# Altium PCB Kill_Switch_4_Layer_JV.PcbDoc
Units mil, origin at the board's own origin, x right, y up, seen from the top; angles counter-clockwise.
Board outline 5825 x 3000 mil, 4 copper layers (Top Layer, Pwr, Gnd, Bottom Layer), stack 30.634 mil thick; 47 components, 44 nets, 247 pads, 16 vias.
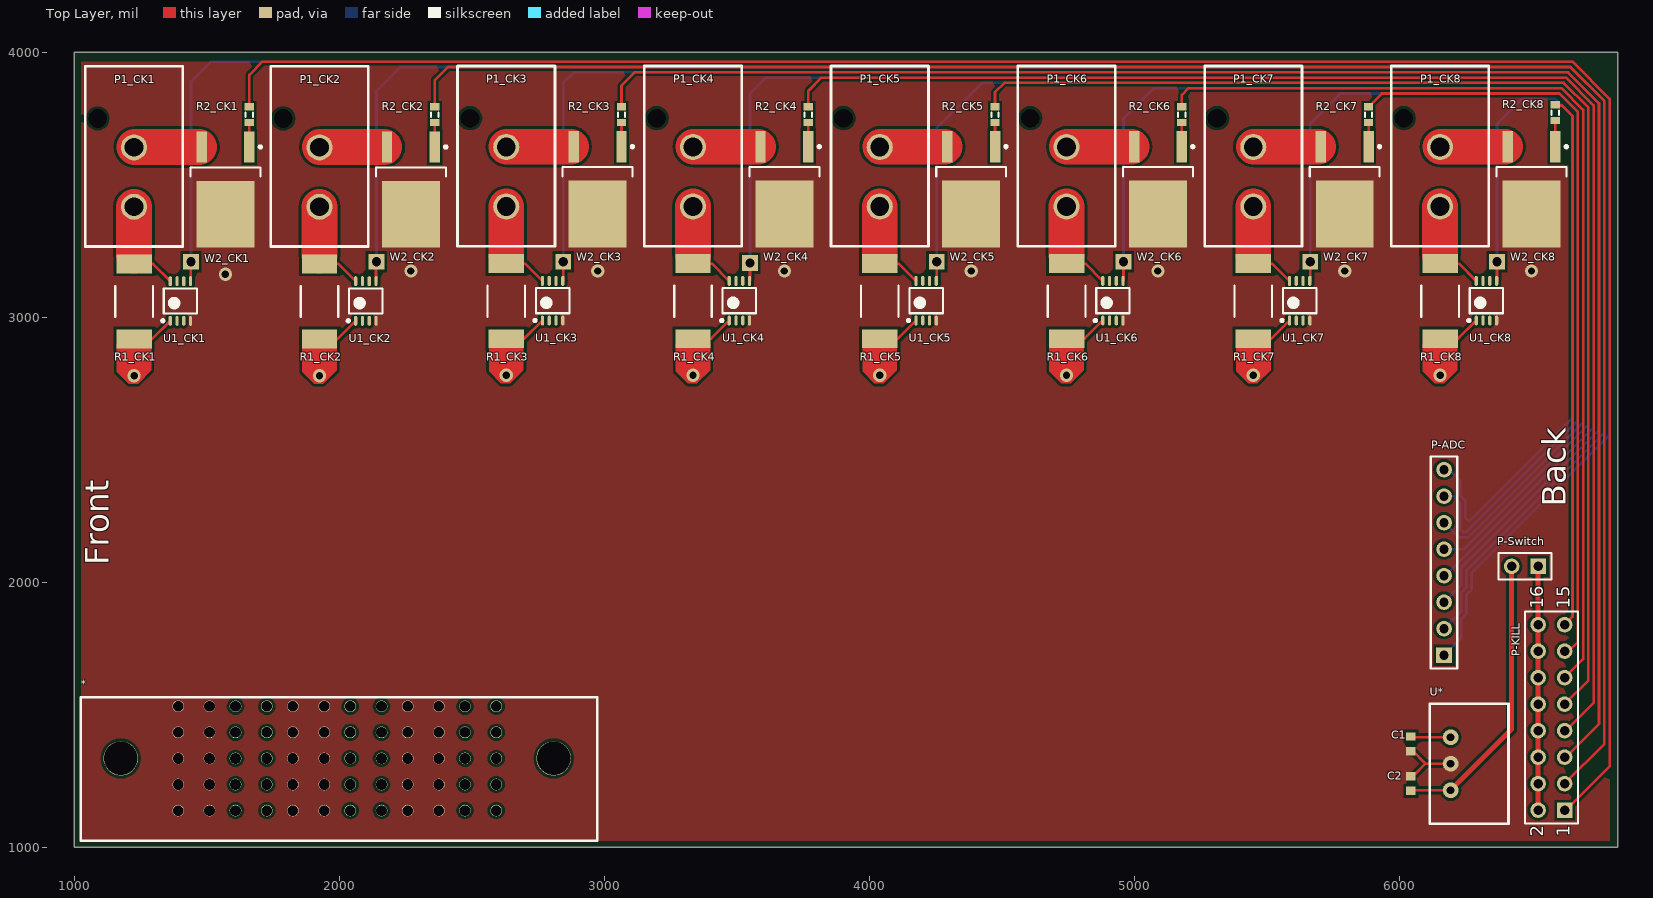
[diagram p0: Top Layer view]
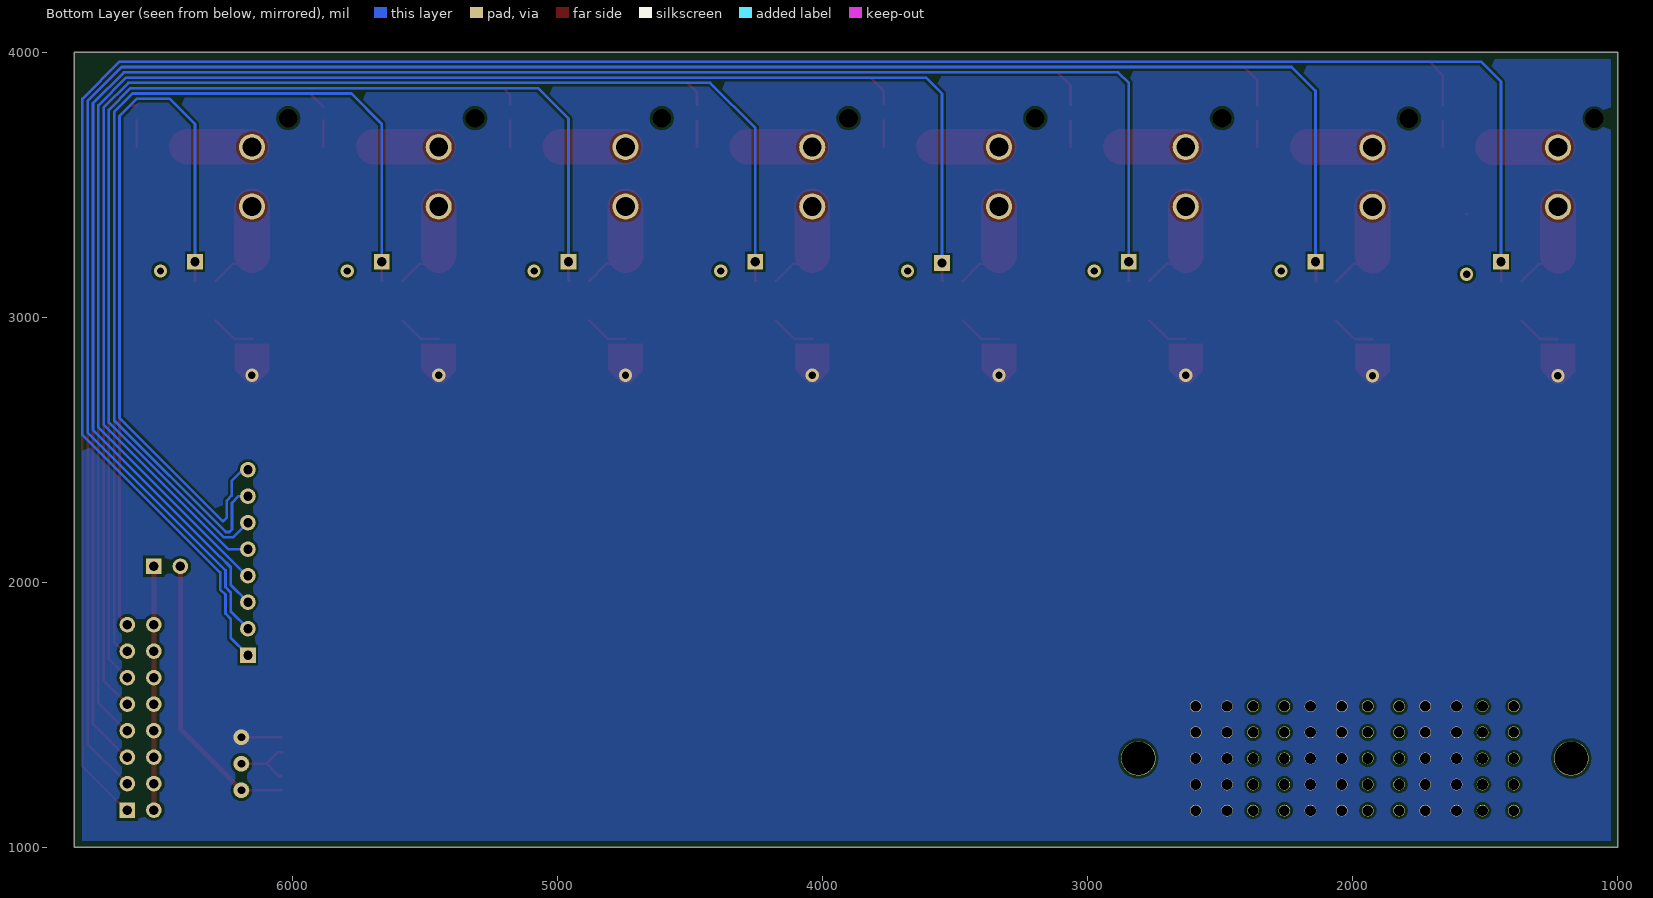
[diagram p1: Bottom Layer view, seen from below]
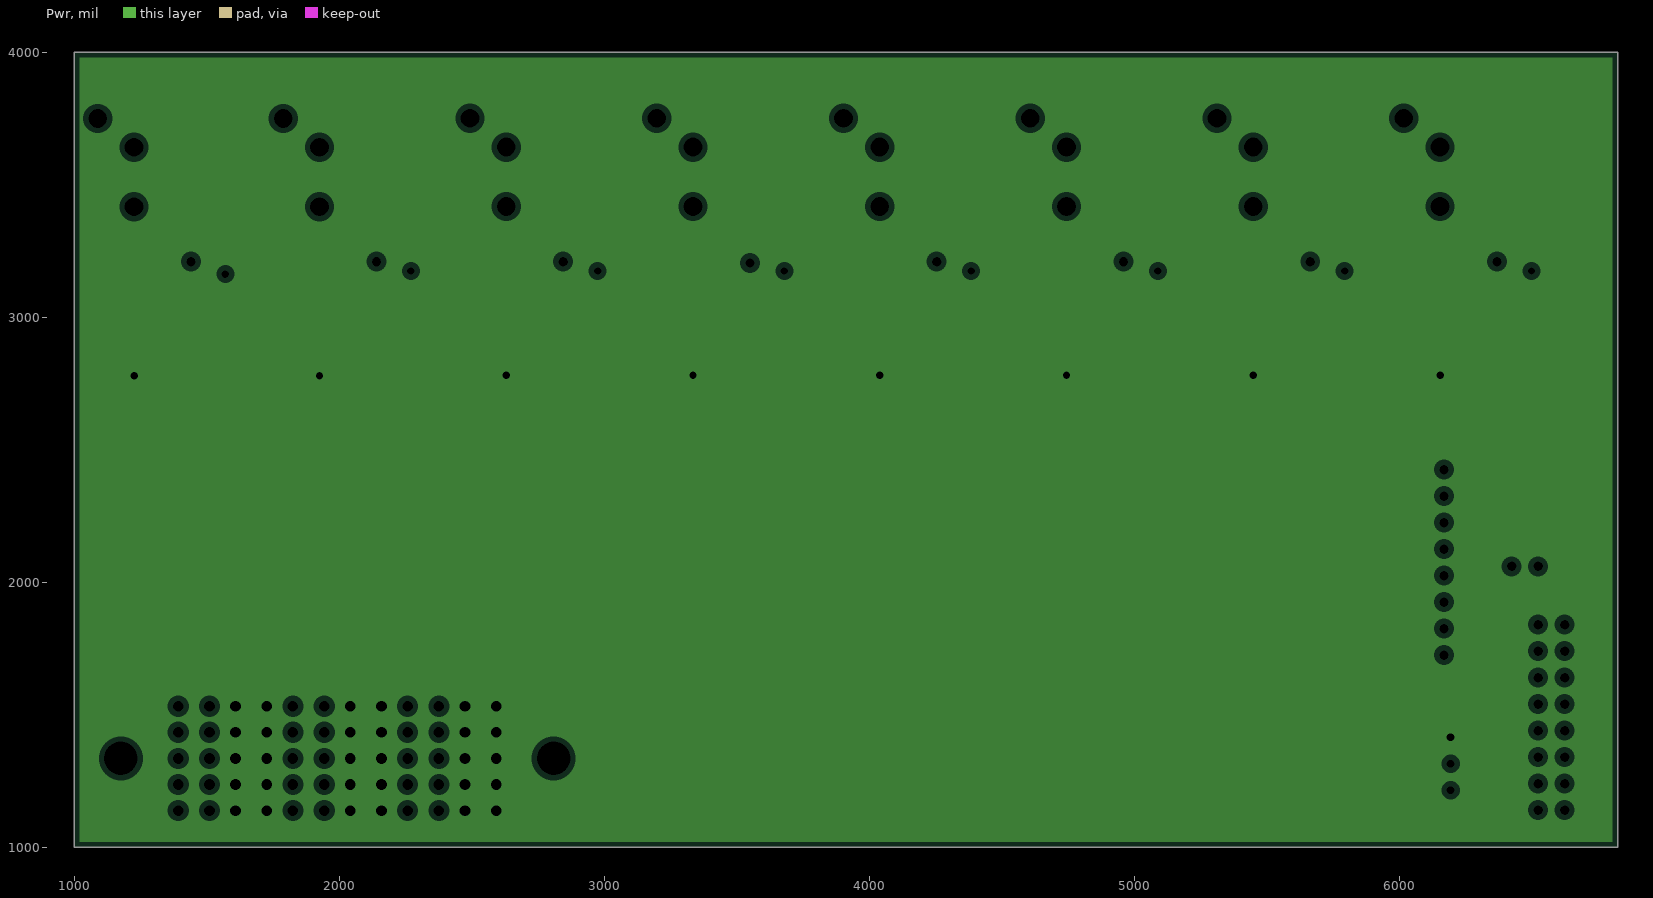
[diagram p2: Pwr, clearances drawn from the general rule]
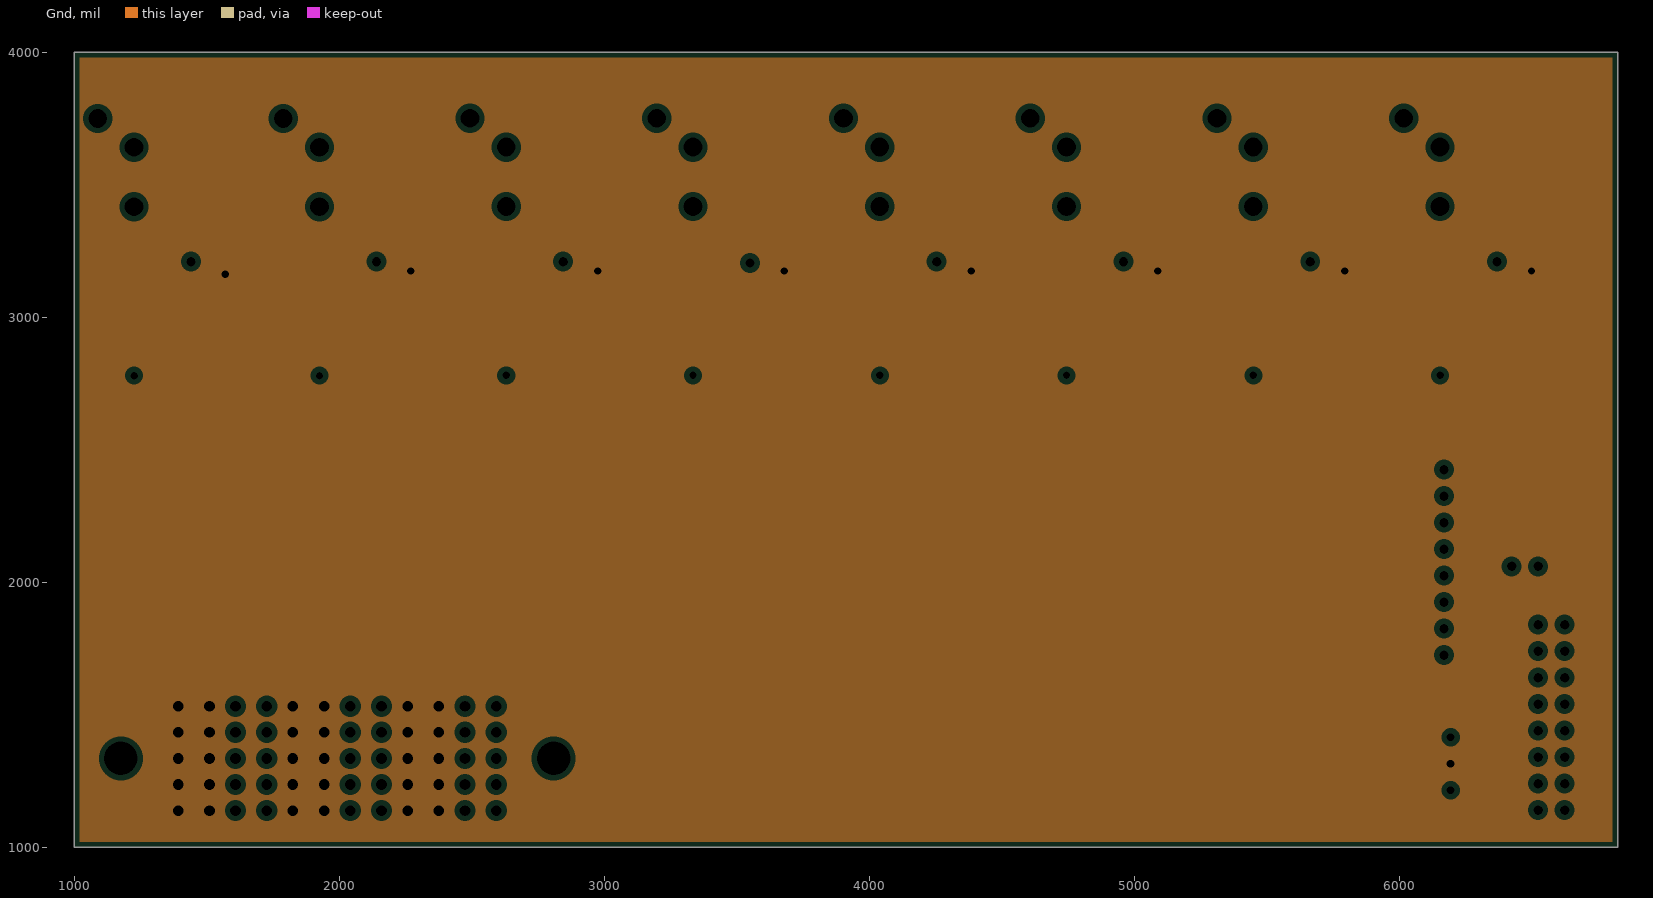
[diagram p3: Gnd, clearances drawn from the general rule]

## Layer stack, top to bottom
Top Solder: solder mask 0.4, Solder Resist, Dk 3.5
Top Layer: signal copper 1.4
Dielectric 1: core 10, FR-4, Dk 4.2
Pwr: plane copper 1.417, net VCC
Dielectric 3: prepreg 5, Dk 4.2
Gnd: plane copper 1.417, net GND
Dielectric 2: core 10, Dk 4.2
Bottom Layer: signal copper 1.4
Bottom Solder: solder mask 0.4, Solder Resist, Dk 3.5

## Board outline
1000,1000 6825,1000 6825,4000 1000,4000

## Design rules (kind name [scope] priority, off if disabled: settings)
Clearance [All] p1: gap=10 ignorepadtopadclearanceinfootprint=FALSE except(0: Arc-Hole Track-Hole SMDPad-Hole THPad-Hole Via-Hole Fill-Hole Poly-Hole Region-Hole Text-Hole)
PlaneClearance [All] p1: clearance=20
PlaneConnect [All] p1: planeconnectstyle=Direct reliefexpansion=20 reliefentries=4 reliefconductorwidth=10 reliefairgap=10
PolygonConnect PolygonConnect_2 [All vs IsNamedPolygon('VCC_L04_P002')] p1: connectstyle=Direct reliefconductorwidth=10 reliefentries=4 polygonreliefangle="90 Angle" airgapwidth=10
PolygonConnect PolygonConnect_1 [All vs IsNamedPolygon('GND_L01_P000')] p2: connectstyle=Direct reliefconductorwidth=10 reliefentries=4 polygonreliefangle="90 Angle" airgapwidth=10
PolygonConnect [All] p3: connectstyle=Direct reliefconductorwidth=10 reliefentries=4 polygonreliefangle="90 Angle" airgapwidth=10
RoomDefinition CK7 [InComponentClass('CK7')] p1: confinementstyle=ConfineIn formatcopy=TRUE lockcomponents=FALSE outline 5945,3976.06 5250,3976.06 5250,2694.21 5945,2694.21
RoomDefinition CK8 [InComponentClass('CK8')] p2: confinementstyle=ConfineIn formatcopy=TRUE lockcomponents=FALSE outline 6650,3976.06 5955,3976.06 5955,2694.21 6650,2694.21
RoomDefinition CK6 [InComponentClass('CK6')] p3: confinementstyle=ConfineIn formatcopy=TRUE lockcomponents=FALSE outline 5240,3976.06 4545,3976.06 4545,2694.21 5240,2694.21
RoomDefinition CK5 [InComponentClass('CK5')] p4: confinementstyle=ConfineIn formatcopy=TRUE lockcomponents=FALSE outline 4535,3976.06 3840,3976.06 3840,2694.21 4535,2694.21
RoomDefinition CK4 [InComponentClass('CK4')] p5: confinementstyle=ConfineIn formatcopy=TRUE lockcomponents=FALSE outline 3830,3976.06 3135,3976.06 3135,2694.21 3830,2694.21
RoomDefinition CK3 [InComponentClass('CK3')] p6: confinementstyle=ConfineIn formatcopy=TRUE lockcomponents=FALSE outline 3125,3976.06 2430,3976.06 2430,2694.21 3125,2694.21
RoomDefinition CK2 [InComponentClass('CK2')] p7: confinementstyle=ConfineIn formatcopy=TRUE lockcomponents=FALSE outline 2420,3975 1725,3975 1725,2693.15 2420,2693.15
RoomDefinition CK1 [InComponentClass('CK1')] p8: confinementstyle=ConfineIn formatcopy=TRUE lockcomponents=FALSE outline 1720,3975 1025,3975 1025,2693.15 1720,2693.15
RoutingVias [All] p1: holewidth=28 width=50 viastyle="Through Hole" minholewidth=28 minwidth=50 maxholewidth=28 maxwidth=50
SolderMaskExpansion [All] p1: expansion=4
Width [All] p1: maxlimit=140 minlimit=10 preferedwidth=10
28 further rules are at their usual default settings.

## Classes and differential pairs
net class Kill_Switch[1..8]: Kill_Switch1 Kill_Switch2 Kill_Switch3 Kill_Switch4 Kill_Switch5 Kill_Switch6 Kill_Switch7 Kill_Switch8 Kill_Switch9
component class CK1: P1_CK1 R1_CK1 R2_CK1 U1_CK1 W2_CK1
component class CK2: P1_CK2 R1_CK2 R2_CK2 U1_CK2 W2_CK2
component class CK3: P1_CK3 R1_CK3 R2_CK3 U1_CK3 W2_CK3
component class CK4: P1_CK4 R1_CK4 R2_CK4 U1_CK4 W2_CK4
component class CK5: P1_CK5 R1_CK5 R2_CK5 U1_CK5 W2_CK5
component class CK6: P1_CK6 R1_CK6 R2_CK6 U1_CK6 W2_CK6
component class CK7: P1_CK7 R1_CK7 R2_CK7 U1_CK7 W2_CK7
component class CK8: P1_CK8 R1_CK8 R2_CK8 U1_CK8 W2_CK8
net class ADC[1..8]: ADC1 ADC2 ADC3 ADC4 ADC5 ADC6 ADC7 ADC8
channel class Current_Kill: CK1 CK2 CK3 CK4 CK5 CK6 CK7 CK8 U_Current_Kill
component class Top: * C1 C2 P-Switch U*

## Components (designator, comment, footprint, x,y, rotation, side; value= is the part's Value field where it differs from the comment)
* "EXTreme Ten60Power Right Angle Plug 6 CKT" "EXTreme Ten60Power Right Angle Plug 6 CKT" 1024.21,1023.98 r0 top
C1 "Cap" 1608[0603] 6045,1390 r90 top value=100pF
C2 "Cap" 1608[0603] 6045,1240 r270 top value=100pF
P1_CK1 "Megafit Slim Vert 2 Peg" 76829-0102 1041.14,3267.32 r0 top (schematic designator P1)
P1_CK2 "Megafit Slim Vert 2 Peg" 76829-0102 1741.14,3267.32 r0 top (schematic designator P1)
P1_CK3 "Megafit Slim Vert 2 Peg" 76829-0102 2446.14,3268.39 r0 top (schematic designator P1)
P1_CK4 "Megafit Slim Vert 2 Peg" 76829-0102 3151.14,3268.39 r0 top (schematic designator P1)
P1_CK5 "Megafit Slim Vert 2 Peg" 76829-0102 3856.14,3268.39 r0 top (schematic designator P1)
P1_CK6 "Megafit Slim Vert 2 Peg" 76829-0102 4561.14,3268.39 r0 top (schematic designator P1)
P1_CK7 "Megafit Slim Vert 2 Peg" 76829-0102 5266.14,3268.39 r0 top (schematic designator P1)
P1_CK8 "Megafit Slim Vert 2 Peg" 76829-0102 5971.14,3268.39 r0 top (schematic designator P1)
P-ADC "Header 8" HDR1X8 6170,1725 r90 top
P-KILL "Header 8X2" HDR2X8 6625,1140 r90 top
P-Switch "Header 2" HDR1X2 6525,2060 r180 top
R1_CK1 "HCS2512" HCS2512FTL300CT-ND_DT 1225,3060 r90 top value=0.0003 (schematic designator R1)
R1_CK2 "HCS2512" HCS2512FTL300CT-ND_DT 1925,3060 r90 top value=0.0003 (schematic designator R1)
R1_CK3 "HCS2512" HCS2512FTL300CT-ND_DT 2630,3061.06 r90 top value=0.0003 (schematic designator R1)
R1_CK4 "HCS2512" HCS2512FTL300CT-ND_DT 3335,3061.06 r90 top value=0.0003 (schematic designator R1)
R1_CK5 "HCS2512" HCS2512FTL300CT-ND_DT 4040,3061.06 r90 top value=0.0003 (schematic designator R1)
R1_CK6 "HCS2512" HCS2512FTL300CT-ND_DT 4745,3061.06 r90 top value=0.0003 (schematic designator R1)
R1_CK7 "HCS2512" HCS2512FTL300CT-ND_DT 5450,3061.06 r90 top value=0.0003 (schematic designator R1)
R1_CK8 "HCS2512" HCS2512FTL300CT-ND_DT 6155,3061.06 r90 top value=0.0003 (schematic designator R1)
R2_CK1 "J1-0603" J1-0603 1660,3765 r270 top value=1K (schematic designator R2)
R2_CK2 "J1-0603" J1-0603 2360,3765 r270 top value=1K (schematic designator R2)
R2_CK3 "J1-0603" J1-0603 3065,3765 r270 top value=1K (schematic designator R2)
R2_CK4 "J1-0603" J1-0603 3770,3765 r270 top value=1K (schematic designator R2)
R2_CK5 "J1-0603" J1-0603 4475,3765 r270 top value=1K (schematic designator R2)
R2_CK6 "J1-0603" J1-0603 5180,3765 r270 top value=1K (schematic designator R2)
R2_CK7 "J1-0603" J1-0603 5885,3765 r270 top value=1K (schematic designator R2)
R2_CK8 "J1-0603" J1-0603 6590,3772.8 r270 top value=1K (schematic designator R2)
U1_CK1 "AD8217" AD8217_DT 1400,3061.73 r90 top (schematic designator U1)
U1_CK2 "AD8217" AD8217_DT 2100,3061.73 r90 top (schematic designator U1)
U1_CK3 "AD8217" AD8217_DT 2805,3062.8 r90 top (schematic designator U1)
U1_CK4 "AD8217" AD8217_DT 3510,3062.8 r90 top (schematic designator U1)
U1_CK5 "AD8217" AD8217_DT 4215,3062.8 r90 top (schematic designator U1)
U1_CK6 "AD8217" AD8217_DT 4920,3062.8 r90 top (schematic designator U1)
U1_CK7 "AD8217" AD8217_DT 5625,3062.8 r90 top (schematic designator U1)
U1_CK8 "AD8217" AD8217_DT 6330,3062.8 r90 top (schematic designator U1)
U* "R-78XX-1.0" R-785.0-1.0 6116.26,1541.38 r270 top
W2_CK1 "IRLR6225TRPBFCT-ND" IRLR6225_DT 1570,3481.73 r270 top (schematic designator W2)
W2_CK2 "IRLR6225TRPBFCT-ND" IRLR6225_DT 2270,3481.73 r270 top (schematic designator W2)
W2_CK3 "IRLR6225TRPBFCT-ND" IRLR6225_DT 2975,3482.8 r270 top (schematic designator W2)
W2_CK4 "IRLR6225TRPBFCT-ND" IRLR6225_DT 3680,3482.8 r270 top (schematic designator W2)
W2_CK5 "IRLR6225TRPBFCT-ND" IRLR6225_DT 4385,3482.8 r270 top (schematic designator W2)
W2_CK6 "IRLR6225TRPBFCT-ND" IRLR6225_DT 5090,3482.8 r270 top (schematic designator W2)
W2_CK7 "IRLR6225TRPBFCT-ND" IRLR6225_DT 5795,3482.8 r270 top (schematic designator W2)
W2_CK8 "IRLR6225TRPBFCT-ND" IRLR6225_DT 6500,3482.8 r270 top (schematic designator W2)

## Footprints (in the part's own frame and the unit in brackets; to place one, negate y for a bottom-side part, rotate by r counter-clockwise, add the part's x,y. Pads: shape width x height; smd on the part's side, far side on the other; paste and mask are expansions set on the pad)
1608[0603] [mm] "Chip Capacitor, Body 1.6x0.8mm, IPC High Density"
  rect 0.8x0.9 smd: 1(-0.7,0) 2(0.7,0)
  body extent -0.87,-0.48 0.87,0.48, height 1.3
76829-0102 [mm] "molex 2 circuit connector megafit slim"
  round 2.5 hole 1.8 mask+0.3: 1(4.67,3.81) 2(4.67,9.51)
  round 0 hole 1.8 unplated: ""(1.19,12.28)
  silkscreen extent 0,0 9.34,17.28, body extent 0.5,0.5 8.85,14.54, height 16.95
AD8217_DT [mm] "MSOP, 8-Leads, 3.00mm x 3.00mm"
  oval 0.95x0.32 smd: 1(-1.9,0.975) 2(-1.9,0.325) 3(-1.9,-0.325) 4(-1.9,-0.975) 5(1.9,-0.975) 6(1.9,-0.325) 7(1.9,0.325) 8(1.9,0.975)
  silkscreen extent -2.02,-1.6 1.2,1.81, body extent -1.6,-1.6 1.6,1.6, height 1.1
"EXTreme Ten60Power Right Angle Plug 6 CKT" [mm]
  round 1.12 hole 1.02: 1(9.33,2.9) 1(9.33,5.4) 1(9.33,7.9) 1(9.33,10.4) 1(9.33,12.9) 1(12.33,2.9) 1(12.33,5.4) 1(12.33,7.9) 1(12.33,10.4) 1(12.33,12.9) 2(14.83,2.9) 2(14.83,5.4) 2(14.83,7.9) 2(14.83,10.4) 2(14.83,12.9) 2(17.83,2.9) 2(17.83,5.4) 2(17.83,7.9) 2(17.83,10.4) 2(17.83,12.9) 3(20.33,2.9) 3(20.33,5.4) 3(20.33,7.9) 3(20.33,10.4) 3(20.33,12.9) 3(23.33,2.9) 3(23.33,5.4) 3(23.33,7.9) 3(23.33,10.4) 3(23.33,12.9) 4(25.83,2.9) 4(25.83,5.4) 4(25.83,7.9) 4(25.83,10.4) 4(25.83,12.9) 4(28.83,2.9) 4(28.83,5.4) 4(28.83,7.9) 4(28.83,10.4) 4(28.83,12.9) 5(31.33,2.9) 5(31.33,5.4) 5(31.33,7.9) 5(31.33,10.4) 5(31.33,12.9) 5(34.33,2.9) 5(34.33,5.4) 5(34.33,7.9) 5(34.33,10.4) 5(34.33,12.9) 6(36.83,2.9) 6(36.83,5.4) 6(36.83,7.9) 6(36.83,10.4) 6(36.83,12.9) 6(39.83,2.9) 6(39.83,5.4) 6(39.83,7.9) 6(39.83,10.4) 6(39.83,12.9)
  round 3.3 hole 3.2 unplated: ""(3.83,7.9) ""(45.33,7.9)
  silkscreen extent 0,0 49.51,13.75
HCS2512FTL300CT-ND_DT [mm] "Molded Capacitor, 2-Leads, Body 6.50 x 3.25mm, IPC Medium Density"
  rect 1.8x3.4 smd: 1(-3.6,0) 2(3.6,0)
  silkscreen extent -1.5,-1.8 1.5,1.8, body extent -3.35,-1.78 3.35,1.78, height 0.91
HDR1X2 [mm] "Connector; Header; 2 Position"
  rect 1.5x1.5 hole 0.9: 1(0,0)
  round 1.5 hole 0.9: 2(2.54,0)
  silkscreen extent -1.27,-1.27 3.81,1.27
HDR1X8 [mm] "Connector; Header; 8 Position"
  rect 1.5x1.5 hole 0.9: 1(0,0)
  round 1.5 hole 0.9: 2(2.54,0) 3(5.08,0) 4(7.62,0) 5(10.16,0) 6(12.7,0) 7(15.24,0) 8(17.78,0)
  silkscreen extent -1.27,-1.27 19.05,1.27
HDR2X8 [mm] "Connector; Header; 8x2 Position"
  rect 1.5x1.5 hole 0.9: 1(0,0)
  round 1.5 hole 0.9: 2(0,2.54) 3(2.54,0) 4(2.54,2.54) 5(5.08,0) 6(5.08,2.54) 7(7.62,0) 8(7.62,2.54) 9(10.16,0) 10(10.16,2.54) 11(12.7,0) 12(12.7,2.54) 13(15.24,0) 14(15.24,2.54) 15(17.78,0) 16(17.78,2.54)
  silkscreen extent -1.27,-1.27 19.05,3.81
IRLR6225_DT [mm] "D-PAK, 3-Pads, Body 6.21x6.73mm (max), IPC Medium Density"
  rect 3x1 smd: 1(-4.1,2.29) 3(-4.1,-2.29)
  rect 6.4x5.55 smd: 4(2.35,0)
  silkscreen extent -4.22,-3.35 -1.25,3.47, body extent -2.15,-3.37 4.07,3.37, height 2.39
J1-0603 [mm] "Chip Resistor, Body 1.6x0.8mm, IPC High Density"
  rect 0.7x0.9 smd: 1(-0.75,0) 2(0.75,0)
  silkscreen extent -0.2,-0.35 0.2,0.35, body extent -0.85,-0.48 0.85,0.48, height 0.9
R-785.0-1.0 [mil]
  round 60 hole 30: 1(126.38,78.74) 2(226.38,78.74) 3(326.38,78.74)
  silkscreen extent 0,0 453,297

## Part data
C1 C2: "Capacitor", LatestRevisionDate=17-Jul-2002, LatestRevisionNote="Re-released for DXP Platform.", PackageDescription="Radial Cap, Thru-Hole; 2 Leads; 0.3 in Pin Spacing", PackageReference=RAD-0.3, Published=8-Jun-2000, Publisher="Altium Limited"
P-ADC: "Header, 8-Pin", LatestRevisionDate=17-Jul-2002, LatestRevisionNote="Re-released for DXP Platform.", Publisher="Altium Limited"
P-KILL: "Header, 8-Pin, Dual row", LatestRevisionDate=17-Jul-2002, LatestRevisionNote="Re-released for DXP Platform.", Publisher="Altium Limited"
P-Switch: "Header, 2-Pin", LatestRevisionDate=17-Jul-2002, LatestRevisionNote="Re-released for DXP Platform.", Publisher="Altium Limited"
R1_CK1 R1_CK2 R1_CK3 R1_CK4 R1_CK5 R1_CK6 R1_CK7 R1_CK8 R2_CK1 R2_CK2 R2_CK3 R2_CK4 R2_CK5 R2_CK6 R2_CK7 R2_CK8: library part Res3, "Resistor", LatestRevisionDate=29-May-2009, LatestRevisionNote="IPC-7351 Footprint Added.", PackageDescription="Chip Resistor", PackageReference=J1-0603, Published=8-Jun-2000, Publisher="Altium Limited"
  R1_CK1 R1_CK2 R1_CK3 R1_CK4 R1_CK5 R1_CK6 R1_CK7 R1_CK8: mfgr_part_num=HCS2512FTL300
P1_CK1 P1_CK2 P1_CK3 P1_CK4 P1_CK5 P1_CK6 P1_CK7 P1_CK8: mfgr_part_num=76829-0102
U1_CK1 U1_CK2 U1_CK3 U1_CK4 U1_CK5 U1_CK6 U1_CK7 U1_CK8: mfgr_part_num=AD8217BRMZ-R7
W2_CK1 W2_CK2 W2_CK3 W2_CK4 W2_CK5 W2_CK6 W2_CK7 W2_CK8: mnfr_part_num=IRLR6225TRPBF

## Free pads (board coordinates)
  rect 59.05x59.05 hole 35.43: 1(1440,3210) 1(2140,3210) 1(2845,3210) 1(3550,3205) 1(4255,3210) 1(4960,3210) 1(5665,3210) 1(6370,3210)

## Via types
v1: diameter 50, hole 28, Top Layer to Bottom Layer, 16 vias

## Nets (pads, with @x,y where several pads share a name; then routed paths per layer and width w, separated by ;. In a path a pad name is that pad's centre, name@x,y a point inside that pad or via, vN(x,y) a via of type N, cw(c..) or ccw(c..) an arc to the next point about the centre after c; other vN are vias at no path point)
ADC1: P-ADC.1 pad.1@1440,3210 U1_CK1.5 | length 8557.1
  Top Layer w10: U1_CK1.5 1438.39,3208.39 pad.1@1440,3210
  Bottom Layer w10: pad.1@1440,3210 1440,3890 1515,3965 6655,3965 6795,3825 6795,2556.72 6275,2036.72 6275,1973.43 6255,1953.43 6255,1881.72 6235,1861.72 6235,1790 P-ADC.1
ADC2: P-ADC.2 pad.1@2140,3210 U1_CK2.5 | length 7686.9
  Top Layer w10: U1_CK2.5 2138.39,3208.39 pad.1@2140,3210
  Bottom Layer w10: pad.1@2140,3210 2140,3855 2230,3945 6646.72,3945 6775,3816.72 6775,2565 6255,2045 6255,1981.72 6235,1961.72 6235,1890 P-ADC.2
ADC3: P-ADC.3 pad.1@2845,3210 U1_CK3.5 | length 6852.7
  Top Layer w10: pad.1@2845,3210 2845,3139.21 U1_CK3.5 U1_CK3.5@2846.46,3137.6
  Bottom Layer w10: pad.1@2845,3210 2845,3885 2885,3925 6638.43,3925 6755,3808.43 6755,2575 6275,2095 6273.28,2095 6235,2056.72 6235,1990 P-ADC.3
ADC4: P-ADC.4 pad.1@3550,3205 U1_CK4.5 | length 5947.2
  Top Layer w10: U1_CK4.5 3550,3139.21 pad.1@3550,3205
  Bottom Layer w10: pad.1@3550,3205 3550,3845 3610,3905 6630.15,3905 6735,3800.15 6735,2585 P-ADC.4@6190,2040
ADC5: P-ADC.5 pad.1@4255,3210 U1_CK5.5 | length 5083.4
  Top Layer w10: U1_CK5.5 4255,3139.21 pad.1@4255,3210
  Bottom Layer w10: pad.1@4255,3210 4255,3715 4425,3885 6621.57,3885 6715,3791.57 6715,2595 6245,2125 P-ADC.5
ADC6: P-ADC.6 pad.1@4960,3210 U1_CK6.5 | length 4336.8
  Top Layer w10: U1_CK6.5 4960,3139.21 pad.1@4960,3210
  Bottom Layer w10: pad.1@4960,3210 4960,3750 5075,3865 6613.28,3865 6695,3783.28 6695,2603.28 6261.72,2170 6225,2170 P-ADC.6
ADC7: P-ADC.7 pad.1@5665,3210 U1_CK7.5 | length 3638
  Top Layer w10: U1_CK7.5 5665,3139.21 pad.1@5665,3210
  Bottom Layer w10: pad.1@5665,3210 5665,3730 5780,3845 6605,3845 6675,3775 6675,2611.57 6253.43,2190 6240,2190 6230,2200 6230,2300 6205,2325 6204.14,2324.14 6170.86,2324.14 P-ADC.7
ADC8: P-ADC.8 pad.1@6370,3210 U1_CK8.5 | length 2881.1
  Top Layer w10: U1_CK8.5 6370,3139.21 pad.1@6370,3210
  Bottom Layer w10: P-ADC.8 6188.28,2425 6231.64,2381.64 6231.64,2326.64 6250,2308.28 6250,2245 6265.07,2229.93 6655,2619.85 6655,3760 6590,3825 6465,3825 6370,3730 pad.1@6370,3210
GND: *.1 *.3 *.5 C1.1 C2.1 U1_CK1.4 U1_CK2.4 U1_CK3.4 U1_CK4.4 U1_CK5.4 U1_CK6.4 U1_CK7.4 U1_CK8.4 U*.2 W2_CK1.4 W2_CK2.4 W2_CK3.4 W2_CK4.4 W2_CK5.4 W2_CK6.4 W2_CK7.4 W2_CK8.4 | length 247.4
  Top Layer w10: W2_CK1.4@1569.84,3389.06 W2_CK1.4 ; C1.1@6041.28,1358.72 6056.28,1358.72 6092.5,1322.5 6100,1315 ; C2.1@6043.78,1268.78 6053.78,1268.78 6100,1315 ; U*.2 6100,1315
  other v1: 1569.84,3163.15 2270,3175 2975,3175 3680,3175 4385,3175 5090,3175 5795,3175 6500,3175
Kill_Switch1: P-KILL.1 R2_CK1.1 | length 8087.1
  Top Layer w10: R2_CK1.1@1660,3801.26 1660,3915 1710,3965 6654.71,3965 6795,3824.71 6795,1305 6632.5,1142.5 P-KILL.1@6622.5,1142.5
Kill_Switch2: P-KILL.3 R2_CK2.1 | length 7221.3
  Top Layer w10: R2_CK2.1@2360,3801.26 2360,3895 2410,3945 6646.42,3945 6775,3816.42 6775,1390 P-KILL.3
Kill_Switch3: P-KILL.5 R2_CK3.1 | length 6355.2
  Top Layer w10: R2_CK3.1@3065,3802.32 3065,3875 3115,3925 6638.14,3925 6755,3808.14 6755,1465 P-KILL.5@6627.5,1337.5
Kill_Switch4: P-KILL.7 R2_CK4.1 | length 5488.8
  Top Layer w10: R2_CK4.1@3770,3802.32 3770,3855 3820,3905 6629.85,3905 6735,3799.85 6735,1545 P-KILL.7@6627.5,1437.5
Kill_Switch5: P-KILL.9 R2_CK5.1 | length 4629.7
  Top Layer w10: R2_CK5.1@4475,3802.32 4475,3850 4510,3885 6621.57,3885 6715,3791.57 6715,1630 P-KILL.9
Kill_Switch6: P-KILL.11 R2_CK6.1 | length 3769.2
  Top Layer w10: R2_CK6.1@5180,3802.32 5180,3840 5205,3865 6613.28,3865 6695,3783.28 6695,1710 P-KILL.11
Kill_Switch7: P-KILL.13 R2_CK7.1 | length 2914.4
  Top Layer w10: R2_CK7.1 5935.47,3845 6605,3845 6675,3775 6675,1775 6640,1740 P-KILL.13 P-KILL.13@6625,1730
Kill_Switch8: P-KILL.15 R2_CK8.1 | length 2015
  Top Layer w10: R2_CK8.1 6592.32,3800 6615,3800 6655,3760 6655,1870 P-KILL.15
NetC2_2: C2.2 P-Switch.2 U*.3 | length 1090.3
  Top Layer w10: C2.2@6045,1215 U*.3
  Top Layer w20: U*.3 6425,1445 P-Switch.2
NetP1_CK1_1: P1_CK1.1 R1_CK1.2 U1_CK1.8 | length 347.8
  Top Layer w10: R1_CK1.2 1296.42,3201.73 U1_CK1.8
  Top Layer w135: R1_CK1.2@1225,3233.15 P1_CK1.1
NetP1_CK1_2: P1_CK1.2 W2_CK1.3 | length 245.4
  Top Layer w10: P1_CK1.2 P1_CK1.2@1226.42,3643.15
  Top Layer w135: P1_CK1.2@1226.42,3643.15 W2_CK1.3@1469.84,3643.15
NetP1_CK2_1: P1_CK2.1 R1_CK2.2 U1_CK2.8 | length 347.8
  Top Layer w10: R1_CK2.2 1996.42,3201.73 U1_CK2.8
  Top Layer w135: R1_CK2.2@1925,3233.15 P1_CK2.1
NetP1_CK2_2: P1_CK2.2 W2_CK2.3 | length 245.4
  Top Layer w10: P1_CK2.2 P1_CK2.2@1926.42,3643.15
  Top Layer w135: P1_CK2.2@1926.42,3643.15 W2_CK2.3@2169.84,3643.15
NetP1_CK3_1: P1_CK3.1 R1_CK3.2 U1_CK3.8 | length 347.8
  Top Layer w10: R1_CK3.2 2701.42,3202.8 U1_CK3.8
  Top Layer w135: R1_CK3.2@2630,3234.21 P1_CK3.1
NetP1_CK3_2: P1_CK3.2 W2_CK3.3 | length 245.4
  Top Layer w10: P1_CK3.2 P1_CK3.2@2631.42,3644.21
  Top Layer w135: P1_CK3.2@2631.42,3644.21 W2_CK3.3@2874.84,3644.21
NetP1_CK4_1: P1_CK4.1 R1_CK4.2 U1_CK4.8 | length 347.8
  Top Layer w10: R1_CK4.2 3406.42,3202.8 U1_CK4.8
  Top Layer w135: R1_CK4.2@3335,3234.21 P1_CK4.1
NetP1_CK4_2: P1_CK4.2 W2_CK4.3 | length 245.4
  Top Layer w10: P1_CK4.2 P1_CK4.2@3336.42,3644.21
  Top Layer w135: P1_CK4.2@3336.42,3644.21 W2_CK4.3@3579.84,3644.21
NetP1_CK5_1: P1_CK5.1 R1_CK5.2 U1_CK5.8 | length 347.8
  Top Layer w10: R1_CK5.2 4111.42,3202.8 U1_CK5.8
  Top Layer w135: R1_CK5.2@4040,3234.21 P1_CK5.1
NetP1_CK5_2: P1_CK5.2 W2_CK5.3 | length 245.4
  Top Layer w10: P1_CK5.2 P1_CK5.2@4041.42,3644.21
  Top Layer w135: P1_CK5.2@4041.42,3644.21 W2_CK5.3@4284.84,3644.21
NetP1_CK6_1: P1_CK6.1 R1_CK6.2 U1_CK6.8 | length 347.8
  Top Layer w10: R1_CK6.2 4816.42,3202.8 U1_CK6.8
  Top Layer w135: R1_CK6.2@4745,3234.21 P1_CK6.1
NetP1_CK6_2: P1_CK6.2 W2_CK6.3 | length 245.4
  Top Layer w10: P1_CK6.2 P1_CK6.2@4746.42,3644.21
  Top Layer w135: P1_CK6.2@4746.42,3644.21 W2_CK6.3@4989.84,3644.21
NetP1_CK7_1: P1_CK7.1 R1_CK7.2 U1_CK7.8 | length 347.8
  Top Layer w10: R1_CK7.2 5521.42,3202.8 U1_CK7.8
  Top Layer w135: R1_CK7.2@5450,3234.21 P1_CK7.1
NetP1_CK7_2: P1_CK7.2 W2_CK7.3 | length 245.4
  Top Layer w10: P1_CK7.2 P1_CK7.2@5451.42,3644.21
  Top Layer w135: P1_CK7.2@5451.42,3644.21 W2_CK7.3@5694.84,3644.21
NetP1_CK8_1: P1_CK8.1 R1_CK8.2 U1_CK8.8 | length 347.8
  Top Layer w10: R1_CK8.2 6226.42,3202.8 U1_CK8.8
  Top Layer w135: R1_CK8.2@6155,3234.21 P1_CK8.1
NetP1_CK8_2: P1_CK8.2 W2_CK8.3 | length 245.4
  Top Layer w10: P1_CK8.2 P1_CK8.2@6156.42,3644.21
  Top Layer w135: P1_CK8.2@6156.42,3644.21 W2_CK8.3@6399.84,3644.21
NetP-KILL_2: P-KILL.2 P-KILL.4 P-KILL.6 P-KILL.8 P-KILL.10 P-KILL.12 P-KILL.14 P-KILL.16 P-Switch.1 | length 920
  Top Layer w10: P-KILL.4@6529.99,1239.75 P-KILL.4@6530.01,1240.25
  Top Layer w20: P-KILL.2@6525,1140.52 P-KILL.4 P-KILL.6 P-KILL.8 P-KILL.10 P-KILL.12 P-KILL.14 P-KILL.16 P-Switch.1
NetR2_CK1_2: R2_CK1.2 W2_CK1.1 | length 99.1
  Top Layer w10: R2_CK1.2@1660,3742.2 1660.16,3742.05 W2_CK1.1
NetR2_CK2_2: R2_CK2.2 W2_CK2.1 | length 99.1
  Top Layer w10: R2_CK2.2@2360,3742.2 2360.16,3742.05 W2_CK2.1
NetR2_CK3_2: R2_CK3.2 W2_CK3.1 | length 99.1
  Top Layer w10: R2_CK3.2@3065,3743.27 3065.16,3743.11 W2_CK3.1
NetR2_CK4_2: R2_CK4.2 W2_CK4.1 | length 99.1
  Top Layer w10: R2_CK4.2@3770,3743.27 3770.16,3743.11 W2_CK4.1
NetR2_CK5_2: R2_CK5.2 W2_CK5.1 | length 99.1
  Top Layer w10: R2_CK5.2@4475,3743.27 4475.16,3743.11 W2_CK5.1
NetR2_CK6_2: R2_CK6.2 W2_CK6.1 | length 99.1
  Top Layer w10: R2_CK6.2@5180,3743.27 5180.16,3743.11 W2_CK6.1
NetR2_CK7_2: R2_CK7.2 W2_CK7.1 | length 99.1
  Top Layer w10: R2_CK7.2@5885,3743.27 5885.16,3743.11 W2_CK7.1
NetR2_CK8_2: R2_CK8.2 W2_CK8.1 | length 99.1
  Top Layer w10: R2_CK8.2 6590.16,3743.11 W2_CK8.1
VCC: *.2 *.4 *.6 C1.2 R1_CK1.1 R1_CK2.1 R1_CK3.1 R1_CK4.1 R1_CK5.1 R1_CK6.1 R1_CK7.1 R1_CK8.1 U1_CK1.1 U1_CK2.1 U1_CK3.1 U1_CK4.1 U1_CK5.1 U1_CK6.1 U1_CK7.1 U1_CK8.1 U*.1 | length 1470.4
  Top Layer w10: R1_CK1.1 1292.95,2918.27 U1_CK1.1 ; R1_CK2.1 1992.95,2918.27 U1_CK2.1 ; R1_CK3.1 2697.95,2919.33 U1_CK3.1 ; R1_CK4.1 3402.95,2919.33 U1_CK4.1 ; R1_CK5.1 4107.95,2919.33 U1_CK5.1 ; R1_CK6.1 4812.95,2919.33 U1_CK6.1 ; R1_CK7.1 5517.95,2919.33 U1_CK7.1 ; C1.2@6045,1415 U*.1 ; R1_CK8.1 6222.95,2919.33 U1_CK8.1
  other v1: 1225,2780 1925,2780 2630,2781.06 3335,2781.06 4040,2781.06 4745,2781.06 5450,2781.06 6155,2781.06
pads on no net: *. P1_CK1. P1_CK2. P1_CK3. P1_CK4. P1_CK5. P1_CK6. P1_CK7. P1_CK8. U1_CK1.2 U1_CK1.3 U1_CK1.6 U1_CK1.7 U1_CK2.2 U1_CK2.3 U1_CK2.6 U1_CK2.7 U1_CK3.2 U1_CK3.3 U1_CK3.6 U1_CK3.7 U1_CK4.2 U1_CK4.3 U1_CK4.6 U1_CK4.7 U1_CK5.2 U1_CK5.3 U1_CK5.6 U1_CK5.7 U1_CK6.2 U1_CK6.3 U1_CK6.6 U1_CK6.7 U1_CK7.2 U1_CK7.3 U1_CK7.6 U1_CK7.7 U1_CK8.2 U1_CK8.3 U1_CK8.6 U1_CK8.7

## Polygon pours and split planes (outlines as drawn)
GND on Top Layer "GND_L01_P000" (solid, pour order 0): 1025,1025 1025,3965 6795,3965 6795,1025
VCC on Bottom Layer "VCC_L04_P002" (solid, pour order 2): 1025,3975 1025,1025 6795,1025 6795,3975
VCC on Pwr (split plane): 6804.9,1020.1 1020.1,1020.1 1020.1,3979.9 6804.9,3979.9
GND on Gnd (split plane): 6804.9,1020.1 1020.1,1020.1 1020.1,3979.9 6804.9,3979.9

## Other copper
Top Layer:
  region net VCC: 1160,2900 1160,2795 1205,2750 1240,2750 1290,2800 1290,2900
  region net VCC: 1860,2900 1860,2795 1905,2750 1940,2750 1990,2800 1990,2900
  region net VCC: 2565,2901.06 2565,2796.06 2610,2751.06 2645,2751.06 2695,2801.06 2695,2901.06
  region net VCC: 3270,2901.06 3270,2796.06 3315,2751.06 3350,2751.06 3400,2801.06 3400,2901.06
  region net VCC: 3975,2901.06 3975,2796.06 4020,2751.06 4055,2751.06 4105,2801.06 4105,2901.06
  region net VCC: 4680,2901.06 4680,2796.06 4725,2751.06 4760,2751.06 4810,2801.06 4810,2901.06
  region net VCC: 5385,2901.06 5385,2796.06 5430,2751.06 5465,2751.06 5515,2801.06 5515,2901.06
  region net VCC: 6090,2901.06 6090,2796.06 6135,2751.06 6170,2751.06 6220,2801.06 6220,2901.06

## Silkscreen, mask and mechanical layers (free items; w line width, h text height)
Top Overlay:
  text "Back" at 6630,2285 h90 r90
  text "Front" at 1130,2065 h90 r90

## Text inside footprints (layer, text, board x,y; h text height)
P-KILL: Top Overlay "2" at 6545,1040 h50 r90; Top Overlay "1" at 6645,1040 h50 r90; Top Overlay "15" at 6645,1900 h50 r90; Top Overlay "16" at 6545,1900 h50 r90